# Altium PCB PCB1.PcbDoc
Units mil, origin at the board's own origin, x right, y up, seen from the top; angles counter-clockwise.
Board outline 6000 x 4000 mil, 2 copper layers (Top Layer, Bottom Layer); 67 components, 53 nets, 228 pads, 101 vias.
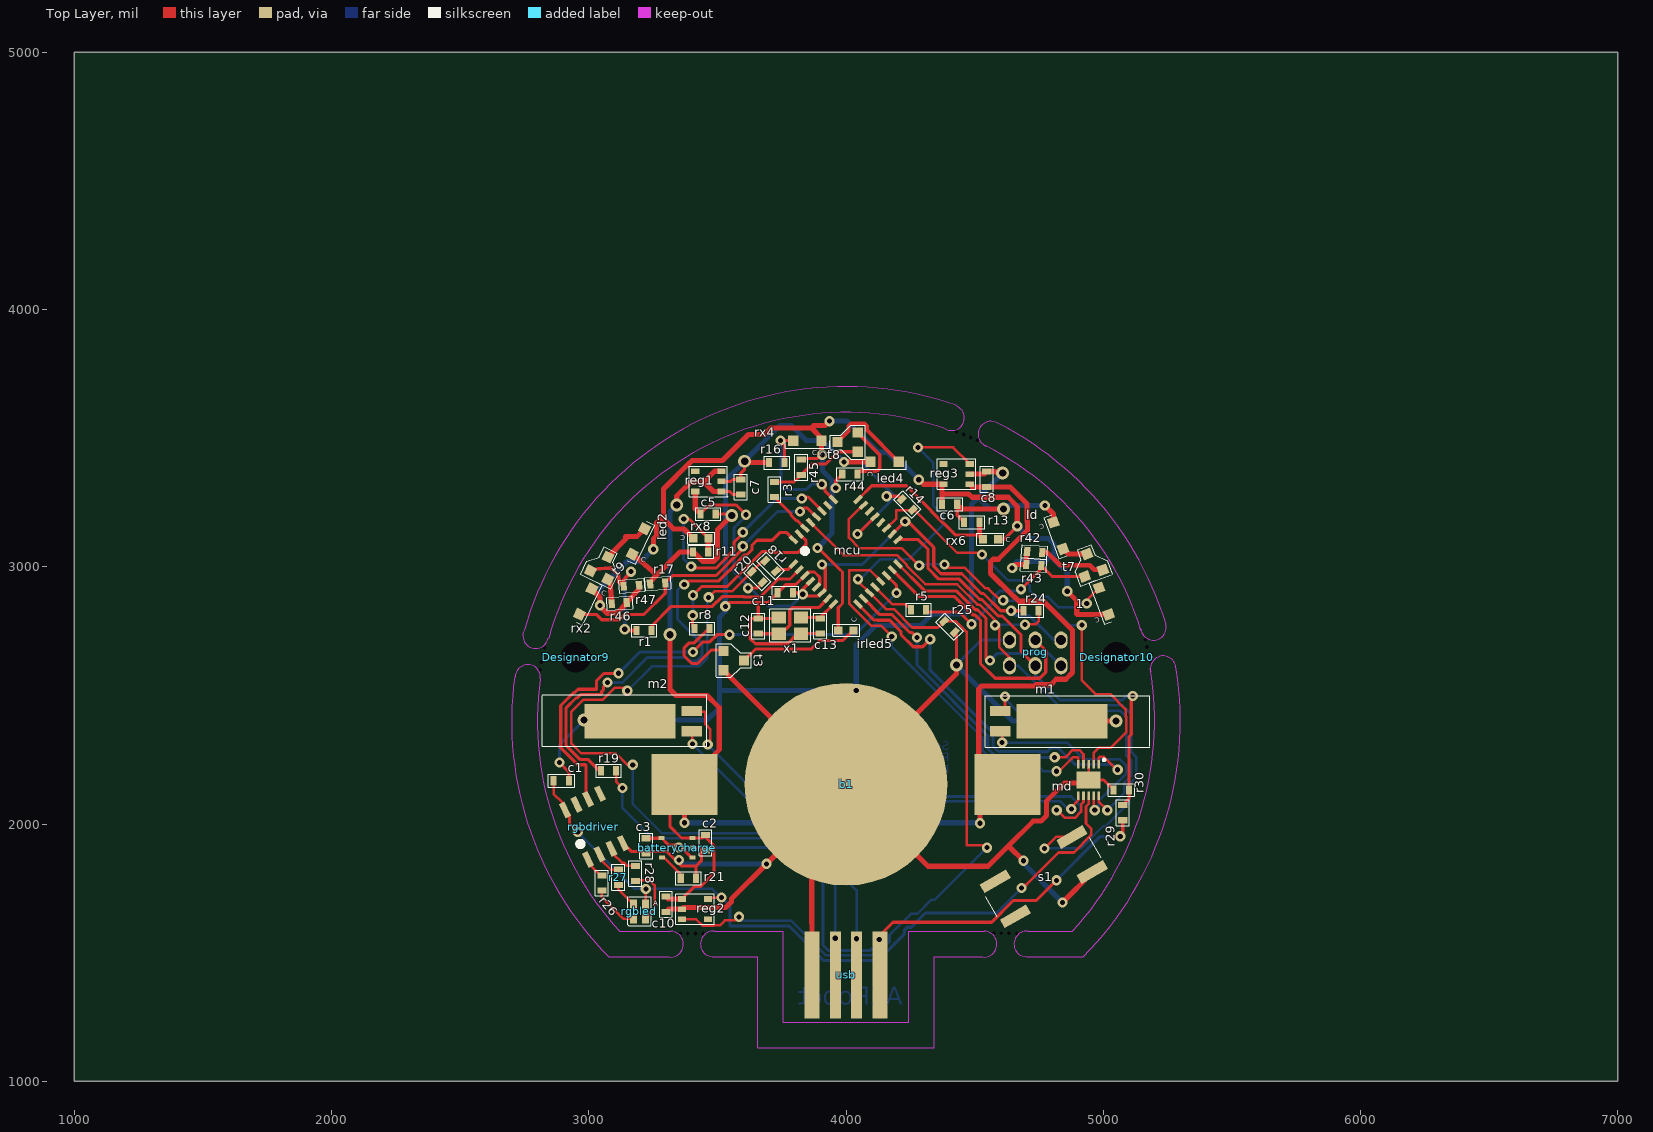
[diagram p0: Top Layer view]
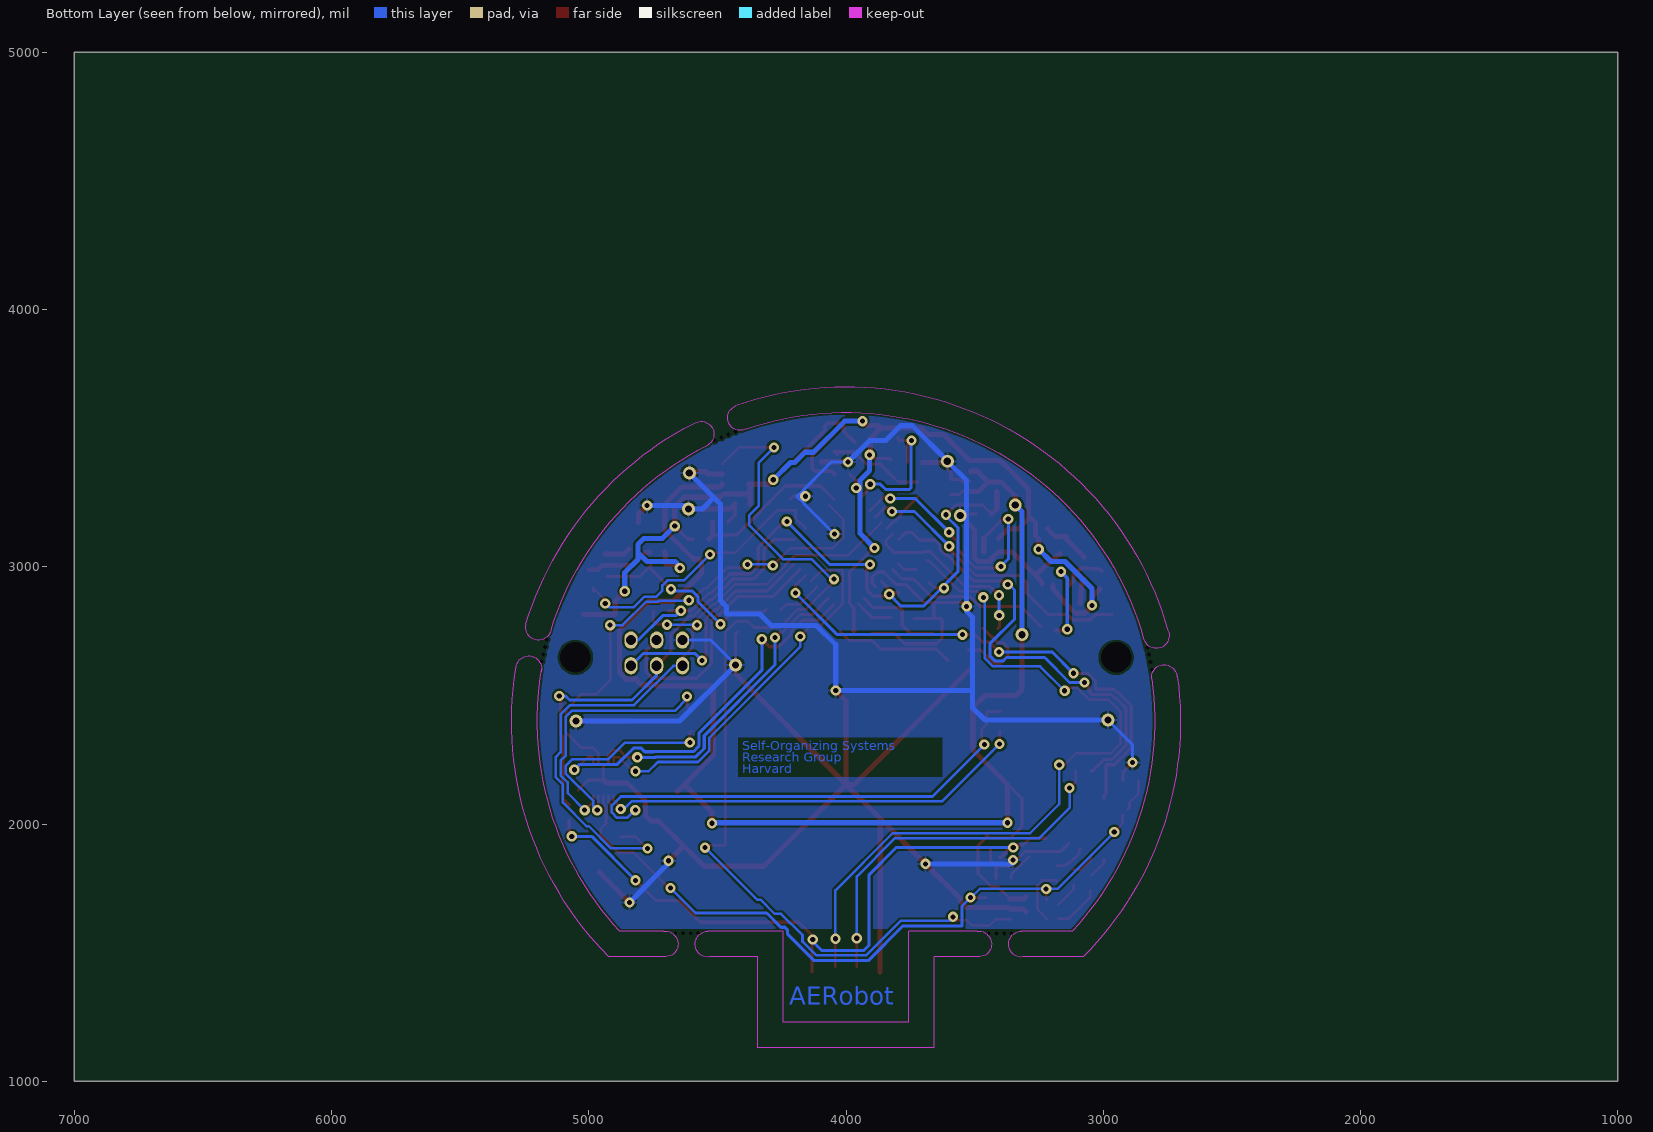
[diagram p1: Bottom Layer view, seen from below]

## Layer stack, top to bottom
Top Layer: signal copper 1.4
Dielectric: dielectric 12.6, FR-4, Dk 4.8
Bottom Layer: signal copper 1.4

## Board outline
1000,1000 7000,1000 7000,5000 1000,5000

## Design rules (kind name [scope] priority, off if disabled: settings)
Clearance [All] p1: gap=9
PolygonConnect [All] p1: connectstyle=Relief reliefconductorwidth=10 reliefentries=4 polygonreliefangle="90 Angle" airgapwidth=10
RoutingVias [All] p1: holewidth=20 width=40 viastyle="Through Hole" minholewidth=20 minwidth=40 maxholewidth=28 maxwidth=50
SilkscreenOverComponentPads [All] p1: minsilkscreentomaskgap=10
SolderMaskExpansion [All] p1: expansion=4
Width [All] p1: maxlimit=20 minlimit=10 preferedwidth=10
27 further rules are at their usual default settings.

## Components (designator, comment, footprint, x,y, rotation, side; value= is the part's Value field where it differs from the comment)
1 "IR_RX" "IR SENSOR" 5002.17,2866.69 r290 top
b1 "battery" BATTERY 4000,2154 r180 top
batterycharge "battery charge" "Battery charger" 3344,1908 r180 top
c1 "0603cap" 0603NEW 2893,2168 r180 top
c2 "0603cap" 0603NEW 3454,1927 r270 top
c3 "0603cap" 0603NEW 3223,1915 r270 top
c5 "0603cap" 0603NEW 3464,3205 r0 top
c6 "0603cap" 0603NEW 4403,3243 r0 top
c7 "0603cap" 0603NEW 3591,3310 r90 top
c8 "0603cap" 0603NEW 4547,3340 r90 top
c10 "0603cap" 0603NEW 3300,1688 r270 top
c11 "0603cap" 0603NEW 3764,2899 r180 top
c12 "0603cap" 0603NEW 3659,2770 r90 top
c13 "0603cap" 0603NEW 3900,2770 r270 top
Designator9 "Comment" HOLE 2950,2648 r0 top
Designator10 "Comment" HOLE 5052,2648 r180 top
irled5 "LED ir down" IRDOWN 3970,2753 r0 top
ld "LED IR" "IR LED" 4824.97,3121.43 r110 top
led2 "LED IR" "IR LED" 3193.18,3098.23 r244 top
led4 "LED IR" "IR LED" 4150,3408 r180 top
m1 "motor_smd" motor 4600,2400 r0 top
m2 "motor_smd" motor 3400,2400 r180 top
mcu "atmega168" 32pintqfp 3999,3058 r45 top
md "motor driver" "MOTOR DRIVER" 4982.37,2171 r270 top
prog "programming connector" "Program connector" 4636,2615 r90 top
r1 "resistor0603" 0603NEW 3215,2752 r0 top
r3 "resistor0603" 0603NEW 3722,3300 r270 top
r5 "resistor0603" 0603NEW 4282,2833 r0 top
r8 "resistor0603" 0603NEW 3440,2760 r0 top
r11 "resistor0603new" 0603NEW 3435,3058 r0 top
r13 "resistor0603new" 0603NEW 4489,3173 r0 top
r14 "resistor0603new" 0603NEW 4238,3242 r315 top
r16 "resistor0603new" 0603NEW 3731,3405 r0 top
r17 "resistor0603new" 0603NEW 3267.72,2935.22 r4 top
r18 "resistor0603" 0603NEW 3707,3003 r135 top
r19 "resistor0603" 0603NEW 3077,2207 r0 top
r20 "resistor0603" 0603NEW 3655,2960 r135 top
r21 "resistor0603" 0603NEW 3387,1789 r0 top
r24 "resistor0603" 0603NEW 4719,2829 r0 top
r25 "resistor0603" 0603NEW 4402,2767 r135 top
r26 "resistor0603" 0603NEW 3051,1771 r90 top
r27 "resistor0603" 0603NEW 3115,1793 r90 top
r28 "resistor0603" 0603NEW 3181,1808 r90 top
r29 "resistor0603" 0603NEW 5076,2044 r270 top
r30 "resistor0603" 0603NEW 5070,2132 r180 top
r42 "resistor0603" 0603NEW 4733.23,3057.67 r176 top
r43 "resistor0603" 0603NEW 4729.68,3006.79 r176 top
r44 "resistor0603" 0603NEW 4015,3360 r180 top
r45 "resistor0603" 0603NEW 3826,3387 r90 top
r46 "resistor0603" 0603NEW 3118.7,2858.64 r4 top
r47 "resistor0603" 0603NEW 3166.1,2926.11 r4 top
reg1 "regulator33" REGULATOR 3465,3332 r180 top
reg2 "regulator33" REGULATOR 3413,1669 r0 top
reg3 "regulator33" REGULATOR 4430,3360 r180 top
rgbdriver "rgbdrivernew" RGBDRIVERNEW 3020,1990 r25 top
rgbled "RGBLED" RGBLED 3197,1660 r90 top
rx2 "IR_RX" "IR SENSOR" 2987.97,2864.54 r64 top
rx4 "IR_RX" "IR SENSOR" 3850,3490 r0 top
rx6 "IR rx down" IRDOWN 4592.06,3107 r180 top
rx8 "IR rx down" IRDOWN 3406,3111 r0 top
s1 "switch" SWITCH 4701,1745 r210 top
t3 "transistor" TRANSISTOR 3603,2635 r270 top
t7 "transistor PNP" TRANSISTOR 4936.43,3049.27 r20 top
t8 "transistor PNP" TRANSISTOR 3967.07,3484.41 r90 top
t9 "transistor PNP" TRANSISTOR 3074.69,3038.18 r334 top
usb "usb" USB 4000,1582.8 r180 top
x1 "xtal1" XTAL1 3782,2771 r0 top

## Footprints (in the part's own frame and the unit in brackets; to place one, negate y for a bottom-side part, rotate by r counter-clockwise, add the part's x,y. Pads: shape width x height; smd on the part's side, far side on the other; paste and mask are expansions set on the pad)
32pintqfp [mm]
  rect 1x0.4 smd: 1(-4.5,2.8) 2(-4.5,2) 3(-4.5,1.2) 4(-4.5,0.4) 5(-4.5,-0.4) 6(-4.5,-1.2) 7(-4.5,-2) 8(-4.5,-2.8) 17(4.5,-2.8) 18(4.5,-2) 19(4.5,-1.2) 20(4.5,-0.4) 21(4.5,0.4) 22(4.5,1.2) 23(4.5,2) 24(4.5,2.8)
  rect 0.4x1 smd: 9(-2.8,-4.5) 10(-2,-4.5) 11(-1.2,-4.5) 12(-0.4,-4.5) 13(0.4,-4.5) 14(1.2,-4.5) 15(2,-4.5) 16(2.8,-4.5) 25(2.8,4.5) 26(2,4.5) 27(1.2,4.5) 28(0.4,4.5) 29(-0.4,4.5) 30(-1.2,4.5) 31(-2,4.5) 32(-2.8,4.5)
  silkscreen extent -3.04,2.67 -2.54,3.17
0603NEW [mm]
  rect 0.6x0.9 smd: 1(-0.75,0) 2(0.75,0)
  silkscreen extent -1.27,-0.64 1.27,0.64
BATTERY [mm]
  round 20 smd: 0(0,0)
  rect 6.5x6 smd: 1(-15.95,0) 2(15.95,0)
"Battery charger" [mm]
  rect 0.6x0.4 smd: 1(-1.5,0.95) 2(-1.5,0) 3(-1.5,-0.95) 4(1.548,-0.95) 5(1.5,0.95)
HOLE [mm]
  rect 0.1x0.1 hole 3: 0(0,0)
"IR LED" [mm]
  rect 1x1 smd: 0(1.4,0) 1(-1.4,0)
  silkscreen extent -2.16,-0.13 2.16,0.74
"IR SENSOR" [mm]
  rect 1x1 smd: 0(-1.4,0) 1(1.4,0)
  silkscreen extent -2.21,-0.76 2.18,-0.03
IRDOWN [mm]
  rect 0.8x0.8 smd: 1(0,0) 2(1.5,0)
  silkscreen extent -0.56,-0.58 2.13,0.61
motor [mm]
  rect 2x1 smd: 0(0,1) 1(0,-1)
  rect 9x3.4 smd: 2(6.1,0)
  silkscreen extent -1.5,-2.58 14.75,2.5
"MOTOR DRIVER" [mm]
  rect 0.85x0.25 smd: 1(-1.55,0) 2(-1.55,-0.5) 3(-1.55,-1) 4(-1.55,-1.5) 5(-1.55,-2) 6(1.55,-2) 7(1.55,-1.5) 8(1.55,-1) 9(1.55,-0.5) 10(1.55,0)
  rect 1.65x2.38 smd: 11(0,-1)
  silkscreen extent -2.07,0.45 -1.91,0.61
"Program connector" [mm]
  oval 1.7x1.3 hole 1: 1(0,0) 2(0,-2.54) 3(0,-5.08) 4(2.54,-5.08) 5(2.54,-2.54) 6(2.54,0)
REGULATOR [mm]
  rect 0.8x0.55 smd: 1(-1.3,1) 2(-1.3,0) 3(-1.3,-1) 4(1.3,-1) 5(1.3,1)
  silkscreen extent -1.91,-1.5 1.91,1.5
RGBDRIVERNEW [mm]
  rect 0.6x1.55 smd: 1(-1.905,-2.7) 2(-0.635,-2.7) 3(0.635,-2.7) 4(1.905,-2.7) 5(1.905,2.7) 6(0.635,2.7) 7(-0.635,2.7) 8(-1.905,2.7)
  silkscreen extent -2.2,-1.25 -1.68,-0.73
RGBLED [mm]
  rect 1x0.7 smd: 1(0.7,0.6) 2(-0.7,0.6) 3(-0.7,-0.6) 4(0.7,-0.6)
  silkscreen extent -1.42,-1.14 1.47,1.14
SWITCH [mm]
  rect 3x1 smd: 1(-6.5,1.75) 2(2.25,1.75) 3(-6.5,-2.25) 4(2.25,-2.25)
  silkscreen extent -7.95,-1.4 3.86,0.97
TRANSISTOR [mm]
  rect 1x1 smd: 1(-0.95,-2) 2(0.95,-2) 3(0,0)
  silkscreen extent -1.68,-2.74 1.65,0.74
USB [mm]
  rect 1.5x8.6 smd: 0(-3.35,4.3) 3(3.35,4.3)
  rect 1.1x8.6 smd: 1(-1.05,4.3) 2(1.05,4.3)
  Keep-Out Layer lines w0.05: 8,0 6.2,0 6.2,9 -6.2,9 -6.2,0 -8,0
XTAL1 [mm]
  rect 1.4x1.2 smd: 1(-1.1,-0.8) 2(1.1,-0.8) 3(1.1,0.8) 4(-1.1,0.8)
  silkscreen extent -2.01,-1.6 2.03,1.68

## Part data
Designator9 Designator10: library part hole
rgbdriver: "rgbdrver"
x1: library part xtal, "xtal"

## Free pads (board coordinates)
  round 0 hole 15 unplated: 0(2810.85,2599.73) 0(2816.57,2629.18) 0(2822.3,2658.63) 0(2827.64,2686.11) 0(3357,1575) 0(3385,1575) 0(3415,1575) 0(3445,1575) 0(4429.96,3526.05) 0(4457.58,3514.33) 0(4485.19,3502.6) 0(4510.97,3491.66) 0(4575.76,1575.03) 0(4603.76,1575.03) 0(4633.76,1575.03) 0(4663.76,1575.03) 0(5163.52,2717.64) 0(5170.27,2688.41) 0(5177.01,2659.18) 0(5183.31,2631.9)

## Via types
v1: diameter 40, hole 20, Top Layer to Bottom Layer, 92 vias
v2: diameter 50, hole 28, Top Layer to Bottom Layer, 9 vias

## Nets (pads, with @x,y where several pads share a name; then routed paths per layer and width w, separated by ;. In a path a pad name is that pad's centre, name@x,y a point inside that pad or via, vN(x,y) a via of type N, cw(c..) or ccw(c..) an arc to the next point about the centre after c; other vN are vias at no path point)
GND: b1.0 batterycharge.2 c1.1 c2.2 c3.2 c5.2 c6.2 c7.2 c8.2 c10.2 c11.2 c12.2 c13.2 ld.0 led2.0 led4.0 m1.2 m2.2 mcu.3 mcu.5 mcu.21 md.3 md.11 prog.6 r11.1 r13.1 r14.1 r16.1 r17.1 r21.2 r25.1 r30.2 reg1.2 reg2.2 reg3.2 rgbdriver.4 s1.1 t3.2 usb.3 x1.2 x1.4 | length 14883.6
  Top Layer w10: md.11 md.3
  Top Layer w12: v1(2886,2239) 2922.53,2202.47 c1.1 ; rgbdriver.4 3164.78,1893.47 3302.97,1893.47 3312.76,1883.69 ; 3312.76,1885.1 3312.76,1883.69 ; batterycharge.2 3433,1908 3437.51,1903.49 3437.51,1856.51 3418,1837 ; r21.2 3416.53,1835.53 3418,1837 ; c5.2 v2@3550,3205 ; reg1.2 3552,3332 3559.53,3339.53 c7.2 3591,3364 3606,3379 v2(3606,3410) ; v1(3531,2846) 3546,2861 3696.47,2861 c11.2 3767.19,2931.72 3805.9,2931.72 mcu.3 3853.53,2979.35 3877.57,2979.35 3898.08,2958.84 3898.08,2935.08 3884.86,2921.86 mcu.5 ; v2@3608.82,3412.82 v2(3606,3410) ; v2@3613.72,3402.28 3611,3405 v2(3606,3410) ; 3659,2855.3 c12.2 ; x1.4@3735.72,2799.53 c12.2 ; x1.2 3811.09,2739.5 3772.47,2700.88 3647.85,2700.88 3626.28,2722.45 3626.28,2794.72 3631.09,2799.53 c12.2 ; x1.2@3826.28,2740.47 c13.2 ; v1(4045,3127) 4112.41,3194.41 mcu.21 ; v1(4158,3274) 4206,3274 r14.1 ; r25.1 4429,2740 v2(4429,2618) ; c6.2 4432.53,3199.94 r13.1 ; md.11 5001.47,2171 r30.2 ; 3312.76,1883.69 3312.76,1883.24 3359,1837 3418,1837
  Top Layer w20: led2.0 3171.48,3048.86 3263.8,2968.61 3237.87,2938.78 r17.1 ; 3250.39,2953.18 3355.21,3058 r11.1 ; c10.2 3310.53,1669 reg2.2 3367.82,1675 3532.15,1675 3555,1697.85 3555,1709 v1(3691,1845) b1.0@3867,2021 ; r11.1@3406.72,3058 3444.43,3020.28 3484.62,3020.28 3500.8,3036.46 3500.8,3143.8 v2(3556,3199) ; t3.2 3967.86,2154 b1.0 ; v2@3611,3405 r16.1 ; 3867,1616.11 3867,1633 ; usb.3@3868.11,1425.32 3868.11,1631.89 3867,1633 ; v1(3992,3407) 3993,3408 led4.0 ; v1(4040,2519) 4000,2479 b1.0 ; v2(4429,2618) 4429,2583 b1.0 ; c6.2 4450.53,3225 v2(4612,3225) ; reg3.2 4537.47,3360 c8.2 4547.47,3370 4581,3370 4587,3364 v2(4609,3364) ; v1(4690,1857) 4636,1911 4636,1919 ; v1(4773,3238) 4806.12,3204.88 ld.0 ; m1.2 v2(5050,2400) ; v1(4842,1695) 4957.07,1810.07 s1.1 ; md.11 4932,2160 4850,2160 4780,2090 4780,2033.11 4757.89,2011 4728,2011 4636,1919 ; 3867,1633 b1.0@3867,2021 ; b1.0@3867,2021 b1.0 ; b1.0 4318.5,1835.5 4552.5,1835.5 4636,1919
  Bottom Layer w12: v1(2886,2239) 2886,2308 v2(2982,2404) ; v1(3992,3407) 4057,3407 4186,3278 ; v1(4045,3127) 4191,3273 4186,3278 ; v1(4158,3274) 4162,3278 4186,3278 ; v2(4429,2618) 4526,2715 prog.6
  Bottom Layer w20: v2(2982,2404) 3460,2404 3508,2452 3508,2514 ; v1(3351,1860) 3351,1853 3359,1845 v1(3691,1845) ; v2@3605,3411 3742.35,3548.35 3748.54,3548.35 ; v2(3606,3410) 3531,3335 v1(3531,2846) 3531,2827 3508,2804 3508,2514 ; 3749.19,3549 3748.54,3548.35 ; v1(3992,3407) 3908,3491 3845.64,3491 3788.29,3548.35 3748.54,3548.35 ; v2(4429,2618) 4647,2400 v2(5050,2400) ; v2(4609,3364) 4514,3269 ; v1(4690,1857) 4690,1847 v1(4842,1695) ; v1(4773,3238) 4625,3238 v2(4612,3225) 4558,3225 4514,3269 ; 3508,2514 3513,2519 v1(4040,2519) 4040,2696.57 4114.43,2771 4289,2771 4289.72,2770.28 4336.43,2817 4464,2817 4464,2843.94 4488,2867.94 4488,3243 4514,3269
Net1_0: 1.0 mcu.19 r14.2 | length 1096.1
  Top Layer w10: mcu.19 4196,3188.19 4196,3220 4266.47,3220 4432.47,3054 4523,3054 v1(4529,3048) ; v1(4936,2857) 4936,2871.17 1.0 1.0@4982.31,2904.1
  Bottom Layer w10: v1(4529,3048) 4630,2947 4694.08,2947 4714,2927.08 4714,2907 4738,2883 4784.87,2883 4825.87,2842 4920,2842 4935,2857 v1(4936,2857)
Netb1_1: b1.1 b1.2 batterycharge.3 c2.1 c7.1 c8.1 c10.1 reg1.1 reg1.3 reg2.1 reg3.1 | length 5969.9
  Top Layer w12: reg2.1 3409.73,1756.28 3434.55,1756.28 3486.72,1808.45 3486.72,1915.5 3454,1948.21 c2.1 3442.87,1945.4 batterycharge.3 3360.4,1945.4 3315,1990.8 3315,2096.95 b1.2 ; reg1.1 3548.37,3292.63 3560.53,3280.47 c7.1
  Top Layer w20: c10.1 3309.16,1708.37 reg2.1 ; v2(3316,2736) 3316,2523 3339.25,2499.75 3459.25,2499.75 3507,2452 3507,2288.95 b1.2 v1(3372.05,2004.95) ; v2(3342,3240) 3342,3275.67 3396.33,3330 3447.61,3330 ; reg1.1 3484.98,3292.63 3447.61,3330 ; reg1.3 3488.98,3371.37 3447.61,3330 ; reg3.1 4491.34,3310.47 c8.1 4638.53,3310.47 4704,3245 4704,3176.15 ; v1(4521,2003) 4521,2047.05 b1.1 ; b1.1@4655.82,2126.13 b1.1 ; 4705,3175.15 4705,3141.85 4592.15,3029 4572,3029 4562,3019 4562,2974.15 4650,2886.15 4651.69,2886.15 4672.13,2865.72 4768.21,2865.72 4880.59,2753.33 4880.59,2588.66 4854.47,2562.54 4817.53,2562.54 4796.53,2541.54 4738.25,2541.54 4732.71,2536 4527,2536 4516,2525 4516,2265.95 b1.1
  Bottom Layer w20: v2(3316,2736) 3316,3214 v2(3342,3240) ; v1(3372.05,2004.95) 4519.05,2004.95 v1(4521,2003)
Netbatterycharge_1: batterycharge.1 batterycharge.4 c3.1 r29.2 usb.0 | length 2644.3
  Top Layer w12: c3.1 batterycharge.4@3282.18,1944.53 ; batterycharge.4 3309.46,1919 3340,1919 v1(3350,1909) ; v1@3356,1915 3375.24,1895.76 3375.24,1893.5 3398.14,1870.6 batterycharge.1 ; v1(4129,1551) usb.0@4131.89,1548.11 ; usb.0@4131.89,1425.32 usb.0@4131.89,1548.11 ; v1(4818,1781) 4739.62,1702.62 4650.59,1702.62 4565.97,1618 4183,1618 4131.89,1566.89 usb.0@4131.89,1548.11 ; v1(5066,1952) 5076,1962 r29.2
  Bottom Layer w12: v1(3350,1909) 3804,1909 3910,1803 3910,1529.28 3930.28,1509 4095,1509 4133,1547 v1(4129,1551) ; v1(4818,1781) 4989,1952 v1(5066,1952)
Netbatterycharge_5: batterycharge.5 r21.1 | length 115.7
  Top Layer w10: batterycharge.5 3291.9,1870.6 3357.47,1805.03 r21.1
Netc1_2: c1.2 md.8 reg2.5 rgbdriver.8 rgbled.4 | length 2942.2
  Top Layer w10: c1.2 2863.47,2117.53 2898,2083 2898,2063.75 rgbdriver.8 ; rgbdriver.8@2925,2036.75 2925,2001 v1(2957,1969) ; rgbled.4@3220.62,1705.62 3222,1707 v1(3222,1747) ; reg2.5@3454.18,1713.37 3515.37,1713.37 v1(3516,1714) ; 4700,1763 4826.09,1889.09 4886.06,1889.09 4953.31,1956.35 4953.31,1982.36 4933,2002.67 4933,2068.08 4943,2078.08 md.8
  Top Layer w12: v1(4682,1751) 4694,1763 4700,1763
  Bottom Layer w10: v1(2957,1969) 3178,1748 3480,1748 3514,1714 v1(3516,1714)
  Bottom Layer w12: v1(3516,1714) 3549,1681 3549,1604 3778.72,1604 3913.72,1469 4123.37,1469 4228.11,1573.74 4228.11,1589.42 4237.47,1598.78 4253.15,1598.78 4308.37,1654 4585,1654 v1(4682,1751)
Netc5_1: c5.1 c11.1 mcu.4 mcu.6 mcu.18 prog.4 r20.1 r24.1 reg1.5 | length 2598.9
  Top Layer w12: c5.1 3469.47,3240 3573,3240 v1(3611,3202) ; v1@3619,2921 v1(3619,2917) 3653.76,2917 r20.1 ; c11.1 v1@3817.73,2899 ; mcu.4 3826,2907.27 3847.17,2886.1 3893.92,2886.1 mcu.6 3919.35,2911.53 3919.35,2996.65 v1(3907,3009) ; mcu.18 4223.36,3171 v1@4225,3171 ; v1(4230,3176) v1@4225,3171 ; 4450.66,2971.59 4526.13,2896.11 4534.35,2896.11 4601.46,2829 v1(4642,2829) r24.1 ; 4450.66,2973 4369.5,2973 4341,3001.5 4341,3075.3 4245.3,3171 v1@4225,3171
  Top Layer w20: reg1.5 3413.82,3225.65 c5.1
  Bottom Layer w12: v1(3611,3202) 3611,3197.43 3564,3150.43 3564,2982.02 3699.02,2847 3786,2847 v1(3832,2893) ; v1(3907,3009) 4063,3009 v1(4230,3176) ; v1(4642,2829) 4660,2811 4711,2811 4807,2715 prog.4
Netc12_1: c12.1 mcu.7 x1.1 | length 360.5
  Top Layer w12: c12.1@3659.97,2739.5 x1.1 3748.1,2739.5 3781.25,2772.66 3781.25,2830.84 3791.53,2841.12 3893.47,2841.12 mcu.7
Netc13_1: c13.1 mcu.8 x1.3 | length 147.2
  Top Layer w12: x1.3@3825.91,2803.1 3900,2803.1 mcu.8
Netirled5_2: irled5.2 t3.3 | length 465.8
  Top Layer w12: t3.3 3647.88,2679.88 3864.22,2679.88 3898,2713.66 3987.66,2713.66 irled5.2@4022,2748
Netld_1: ld.1 t7.3 | length 101
  Top Layer w20: ld.1 4864.18,3049.27 t7.3
Netled2_1: led2.1 t9.3 | length 193.6
  Top Layer w20: t9.3 3144,3107.48 3144,3117 3186.57,3117 led2.1
Netled4_1: led4.1 t8.3 | length 353.3
  Top Layer w15: t8.3 4009.63,3526.96 4009.63,3548.33 4019.29,3558 4072.33,3558 4082,3548.33 4082,3531.12 led4.1
Netm1_0: m1.0 md.10 | length 1053.1
  Top Layer w10: m1.0 4618,2457.37 v1(4618,2496) ; md.10 4982.37,2087.63 v1(5016,2054)
  Bottom Layer w10: v1(4618,2496) 4618,2487 4665,2440 5066.57,2440 5089,2417.57 5089,2267 5109,2247 5109,2189.05 5081.64,2161.69 5081.64,2119.64 v1(5016,2054)
Netm1_1: m1.1 md.9 | length 847.4
  Top Layer w10: m1.1 4607,2353.63 v1(4607,2317) ; md.9 4962.69,2058.32 v1(4967,2054)
  Bottom Layer w10: v1(4607,2317) 4608,2316 4860,2316 4924,2252 5063.08,2252 5090,2225.08 5090,2196.92 4982,2088.92 4982,2069 v1(4967,2054)
Netm2_0: m2.0 md.6 | length 1692.1
  Top Layer w10: m2.0 3403,2357.63 v1(3403,2311) ; v1(4876,2058) 4876,2064.82 4903.63,2092.45 md.6
  Bottom Layer w10: v1(3403,2311) 3626,2088 4833.08,2088 4863.08,2058 v1(4876,2058)
Netm2_1: m2.1 md.7 | length 2063.5
  Top Layer w10: m2.1 3403.37,2436 3453,2436 3453,2387.9 3473,2367.9 3473,2320 v1(3462,2309) ; v1(4819,2054) 4821,2054 4851,2024 4890.08,2024 4914,2047.92 4914,2075.95 4923.32,2085.27 md.7
  Bottom Layer w10: v1(3462,2309) 3664,2107 4875.08,2107 4910,2072.08 4910,2043.92 4890.08,2024 4851,2024 4821,2054 v1(4819,2054)
Netmcu_1: mcu.1 r18.1 | length 76.9
  Top Layer w12: r18.1@3727.88,2988.9 3774,2988.9 mcu.1
Netmcu_2: mcu.2 r1.2 | length 669.5
  Top Layer w12: r1.2@3241.91,2767.01 3320.9,2846 3480.5,2846 3518.5,2884 3602.5,2884 3604.5,2882 3665.67,2882 3736.39,2952.72 3782.36,2952.72 mcu.2
Netmcu_9: mcu.9 md.1 | length 1540.2
  Top Layer w10: md.1 4982.37,2256.37 4988,2262 5001,2262 5052,2211 v1(5056,2211)
  Top Layer w12: mcu.9 4108.84,2792.27 4122.27,2792.27 4122.53,2792 4170,2792 4214,2748 4214,2736.09 4261.09,2689 4298,2689 v1(4327,2718)
  Bottom Layer w12: v1(4327,2718) 4327,2597.27 4572,2352.27 4572,2302.5 4592.5,2282 4747.27,2282 4748.27,2281 4782.09,2281 4796.09,2295 4825.91,2295 4888.91,2232 5035,2232 v1(5056,2211)
Netmcu_10: mcu.10 md.4 | length 1259.6
  Top Layer w10: v1(4811,2259) 4854,2259 4857,2262 4857,2262.7 4881.3,2287 4907,2287 4923.31,2270.69 md.4
  Top Layer w12: mcu.10 4131.64,2814 4178.72,2814 4248.72,2744 4257,2744 v1(4276,2725)
  Bottom Layer w12: v1(4276,2725) 4276,2618.57 4551,2343.57 4551,2293.8 4583.8,2261 4738.57,2261 4740.57,2259 v1(4811,2259)
Netmcu_11: mcu.11 r25.2 reg2.3 reg3.3 | length 3889.4
  Top Layer w10: reg2.3 3417.81,1629.63 3442.63,1604.8 3485.73,1604.8 3486.93,1606 3510,1606 3529,1625 3570,1625 v1(3584,1639) ; v1(4047,2952) 4047,2943.19 mcu.11 4155.19,2835 4186,2835 4257,2764 4357.24,2764 r25.2 4427.39,2787.88 4469,2746.27 4469,1918 4534,1918 4553,1899 4553,1903 v1(4548,1908) ; v1(4280,3464) 4416.55,3464 reg3.3
  Bottom Layer w10: v1(3584,1639) 3599,1624 3787,1624 3922,1489 4115.08,1489 4169.06,1542.98 4169.06,1568.06 4251.94,1650.94 4277.02,1650.94 4331,1704.92 4344.92,1704.92 v1(4548,1908) ; v1@4064.5,2961 4133.37,3029.88 4244.88,3029.88 4376,3161 4376,3200.5 4340,3236.5 4340,3404 v1(4280,3464)
Netmcu_12: mcu.12 r5.1 | length 176
  Top Layer w10: mcu.12 4180.73,2854 4231.47,2854 r5.1
Netmcu_13: mcu.13 md.5 | length 1535.6
  Top Layer w10: mcu.13 4092.27,2987 4012,2987 4011.84,2987.16 4011.84,2856.91 4097.75,2771 4135.91,2771 v1(4178,2728.91) ; v1(4818,2205) 4828.28,2205 4877,2253.72 4877,2254.41 4882.59,2260 4900,2260 4903.63,2256.37 md.5
  Bottom Layer w10: v1(4178,2728.91) 4178,2688.28 4531,2335.28 4531,2285.52 4575.52,2241 4730.28,2241 4733.28,2238 4734.7,2238 4767.7,2205 v1(4818,2205)
Netmcu_14: mcu.14 rgbdriver.6 | length 2014.7
  Top Layer w12: rgbdriver.6 2997.73,2110.27 2990,2118 2990,2227.77 2987.3,2230.47 2956.6,2230.47 2891,2296.08 2891,2460.4 2941.6,2511 2946.14,2511 2959.07,2523.93 3029.5,2523.93 3029.5,2556 3058.5,2585 3115,2585 v1(3116,2586) ; v1(3405,2669) 3443.96,2707.96 3470.96,2707.96 3499,2736 v1(3547,2736) ; mcu.14 4196,2927.81 v1(4196,2898)
  Bottom Layer w12: v1(3116,2586) 3199,2669 v1(3405,2669) ; v1(3547,2736) 4034,2736 v1(4196,2898)
Netmcu_15: mcu.15 prog.5 | length 1021.2
  Top Layer w12: mcu.15 4284.36,2884 4422.28,2884 4494.28,2812 4502.5,2812 4523,2791.5 4523,2623.46 4579.93,2566.54 4752.81,2566.54 4776.59,2590.31 4776.59,2674.41 prog.5
Netmcu_16: mcu.16 prog.3 | length 918.1
  Top Layer w12: mcu.16 4300.9,2912 4301,2912 4308,2905 4430,2905 ; 4432.52,2903.46 4502.98,2833 4511.2,2833 4544,2800.2 4544,2637.96 v1@4546,2635.96 ; v1@4546,2635 4552.52,2628.48 v1(4560,2635.96)
  Bottom Layer w12: v1(4560,2635.96) 4587.51,2663.46 4787.54,2663.46 prog.3
Netmcu_17: mcu.17 prog.2 r29.1 r30.1 | length 1720.7
  Top Layer w12: mcu.17 4281.28,3105.33 4319.3,3067.3 4319.3,2993.5 4360.8,2952 4440.12,2952 ; 4440.77,2951.77 4519.55,2873 4527.76,2873 4592.76,2808 4608.28,2808 4680,2736.28 4680,2671 prog.2 ; r29.1 5099.53,2097.06 r30.1 5099.53,2338.24 5109,2347.72 5109,2492 v1(5115,2498)
  Bottom Layer w12: prog.2 4736,2612 4736,2578.01 4832.15,2481.86 5075,2481.86 5091.14,2498 v1(5115,2498)
Netmcu_23: mcu.23 md.2 | length 1912
  Top Layer w10: mcu.23@4064.95,3238.95 4011,3185 4011,3112.92 4052.08,3071.84 4217.43,3071.84 v1(4284.3,3004.97) ; v1(4383,3009) 4395,2997 4460.6,2997 4541.49,2916.11 4552.03,2916.11 4598.15,2870 v1(4611,2870) ; v1(4917,2773) 4917,2558 4970,2505 5028,2505 5087,2446 5087,2418.15 5089,2416.15 5089,2356 5030,2297 4983,2297 4962.69,2276.69 md.2
  Bottom Layer w10: v1@4283,3006.26 v1(4284.3,3004.97) ; v1@4297,3009 v1(4383,3009) ; v1(4611,2870) 4613,2868 4726.13,2868 4730.13,2864 4777,2864 4868,2773 v1(4917,2773)
Netmcu_24: mcu.24 r13.2 rx6.2 | length 647.9
  Top Layer w12: mcu.24 4100.1,3315 4235.25,3315 4332,3218.25 4332,3216.11 4424.11,3124 4516,3124 rx6.2@4518.53,3121.47
  Top Layer w20: r13.2 4518.53,3121.47 rx6.2
Netmcu_25: mcu.25 r16.2 rx4.0 | length 606.6
  Top Layer w12: v1@3754,3500 v1(3745,3491) ; r16.2 3760.53,3475.47 v1(3745,3491) ; rx4.0 3793.88,3491 v1(3745,3491) ; rx4.0@3794.88,3500 rx4.0@3799.53,3500 ; v1(3906,3321) 3919,3308 3919,3293 3950.78,3261.22 mcu.25
  Bottom Layer w12: v1(3745,3491) 3736,3491 3747,3480 3747,3307 3753,3301 3846.25,3301 3866.25,3321 v1(3906,3321)
Netmcu_27: mcu.27 r11.2 rx8.2 | length 1045.9
  Top Layer w12: v1(3369,3186) 3390.05,3186 rx8.2 ; v1(3398,3001) 3403.72,2995.28 3494.98,2995.28 3564,3064.31 3564,3094.5 3599,3129.5 v1(3599,3134) ; v1(3828,3265) 3834,3271 3852.81,3271 mcu.27
  Top Layer w20: r11.2 3464.53,3110.47 rx8.2
  Bottom Layer w12: v1(3369,3186) 3369,3030 v1(3398,3001) ; v1(3599,3134) 3730,3265 v1(3828,3265)
Netmcu_28: mcu.28 r17.2 rx2.0 | length 1153
  Top Layer w12: rx2.0 3029.04,2815 3049.95,2794.08 3118.84,2794.08 3139.75,2815 3215,2815 3297.17,2897.17 r17.2 3325.89,2966 3495.39,2966 3599,3069.61 v1(3599,3080) ; v1(3821,3215) 3834,3228 3850,3228 3883.59,3194.41 mcu.28
  Bottom Layer w12: v1(3599,3080) 3734,3215 v1(3821,3215)
Netmcu_29: mcu.29 prog.1 r24.2 s1.3 | length 2752.7
  Top Layer w10: mcu.29 3989.57,3045.16 4196.02,3045.16 4197.02,3044.16 4199.67,3044.16 4235.71,3008.12 4235.71,3005.47 4309.18,2932 4432.27,2932 4511.27,2853 4519.48,2853 4596.41,2776.07 v1@4596.41,2771 ; v1(4579,2773) 4581,2771 v1@4596.41,2771 ; prog.1 4636,2647.4 4596.41,2686.99 v1@4596.41,2771 ; v1(4696,2775) 4698,2777 4738,2777 4748.53,2787.53 r24.2 ; v1(4772,1905) 4816.67,1949.67 s1.3
  Bottom Layer w10: v1(4579,2773) 4581,2775 v1(4696,2775) ; prog.1 4670.72,2615 4823.86,2461.86 5072.99,2461.86 5109,2425.85 5109,2280 5128,2261 5128,2181.18 5100.64,2153.82 5100.64,2083.14 5008.75,1991.25 4999.97,1991.25 4913.72,1905 v1(4772,1905)
Netmcu_30: mcu.30 r3.2 | length 171.8
  Top Layer w12: r3.2 3786,3206.47 3786,3200.5 3806.5,3180 3810.19,3180 mcu.30
Netmcu_31: mcu.31 r8.1 | length 710.6
  Top Layer w12: v1(3404,2811) 3404,2766.47 r8.1 ; v1(3405,2889) 3440,2924 3539.33,2924 3675.08,3059.76 3696.51,3059.76 3700.27,3056 3814,3056 3845,3087 3845,3100.64 mcu.31
  Bottom Layer w12: v1(3404,2811) 3407,2814 3407,2818 3405,2820 v1(3405,2889)
Netmcu_32: mcu.32 r19.1 | length 1811.9
  Top Layer w12: r19.1 3040.47,2207 2996,2251.47 2965.3,2251.47 2912,2304.77 2912,2451.7 2950.3,2490 2954.84,2490 2967.77,2502.93 3044.63,2502.93 3050.5,2508.8 3050.5,2515.5 3058,2523 3058,2535 ; v1@3064,2541 v1(3073,2550) ; v1(3371,2931) 3385,2945 3505.51,2945 3582.51,3022 3582.51,3023.41 3604.09,3045 3613.5,3045 3634,3065.5 3634,3083 3654,3103 3713,3103 3744,3134 3767.1,3134 mcu.32
  Bottom Layer w12: v1(3073,2550) 3130.91,2550 3227.91,2647 3376.09,2647 3390.09,2633 3419.91,2633 3440.91,2654 3440.91,2700.09 3345,2796 3345,2910 3366,2931 v1(3371,2931)
Netr1_1: r1.1 r47.1 t9.1 | length 531.5
  Top Layer w12: t9.1 t9.1@3010.72,2988.59
  Top Layer w15: t9.1 3012.11,2990.19 3084.77,2995.27 3116.1,2968.04 3118.04,2940.23 r47.1 3135.01,2947.47 v1(3164.26,2981.12) ; v1(3140,2757) 3145,2752 r1.1
  Bottom Layer w15: v1(3140,2757) 3140,2956.85 v1(3164.26,2981.12)
Netr3_1: r3.1 r45.1 t8.1 | length 389.1
  Top Layer w12: r3.1 3798.06,3329.53 r45.1 3868.53,3400 3922.5,3400 3969.51,3447.01 t8.1 4034.28,3435.47 t8.1@4034,3435.47
Netr5_2: r5.2 r43.1 t7.1 | length 770.5
  Top Layer w12: r5.2 4320.77,2823.76 4441.24,2823.76 v1(4488,2777) ; v1(4680,2913) 4759.13,2992.13 r43.1 4801.38,2962.49 t7.1
  Bottom Layer w12: v1(4488,2777) 4576,2865 4576,2884.5 4597.5,2906 4673,2906 v1(4680,2913)
Netr8_2: r8.2 t3.1 | length 348.9
  Top Layer w12: 3370,2685 3370,2654.5 3400.79,2623.72 3423.19,2623.72 3475.28,2675.8 t3.1@3525,2675.8 ; 3371.5,2685 3390.5,2704 3410.3,2704 3466.3,2760 r8.2
Netr18_2: r18.2 r20.2 usb.1 | length 2998.1
  Top Layer w10: v1(3150,2518) 3138,2530 3101.08,2530 3054.01,2482.93 2978,2482.93 2932,2436.93 2932,2313.06 2970.06,2275 3105.53,2275 3150.53,2230 v1(3171,2230) ; v1(3466,2881) 3489,2904 3557.24,2904 r20.2 3677.12,3023.88 r18.2 ; v1(4041,1554) 4041.34,1553.66 usb.1@4041.34,1445
  Bottom Layer w10: v1(3150,2518) 3245,2613 3428.2,2613 3460.91,2645.72 3460.91,2875.91 v1(3466,2881) ; v1(3171,2230) 3171,2077 3284,1964 3818.85,1964 4041,1741.85 v1(4041,1554)
Netr19_2: r19.2 usb.2 | length 1443.3
  Top Layer w10: r19.2 3106.53,2164.47 v1(3131,2140) ; v1(3958,1556) 3958.66,1555.34 usb.2@3958.66,1445
  Bottom Layer w10: v1(3131,2140) 3131,2063 3250,1944 3810.57,1944 3958,1796.57 v1(3958,1556)
Netr26_1: r26.1 rgbled.2 | length 183
  Top Layer w10: r26.1 3051,1715 3133.56,1632.44 rgbled.2
Netr26_2: r26.2 rgbdriver.1 | length 81.5
  Top Layer w10: rgbdriver.1 2996.95,1849.05 r26.2@3045.47,1800.53
Netr27_1: r27.1 rgbled.1 | length 100.1
  Top Layer w10: r27.1 3115,1745.94 rgbled.1
Netr27_2: r27.2 rgbdriver.2 | length 108
  Top Layer w10: rgbdriver.2 3048,1877.36 3048,1860 3085.47,1822.53 r27.2
Netr28_1: r28.1 rgbled.3 | length 229
  Top Layer w10: r28.1 r28.1@3183.53,1781 ; r28.1@3184.53,1782 r28.1@3183.53,1781 ; rgbled.3 3256,1667.82 3256,1761.08 3236.08,1781 r28.1@3183.53,1781
Netr28_2: r28.2 rgbdriver.3 | length 128.5
  Top Layer w10: rgbdriver.3 3093,1898.81 3093,1886 3130.66,1848.34 3138.52,1848.34 3149.33,1837.53 r28.2
Netr42_1: r42.1 t7.2 | length 264.9
  Top Layer w18: r42.1@4762.77,3056.72 r42.1 4782.39,3055.61 4832.28,3005.72 4947.44,3005.72 4965.08,2988.07 t7.2
Netr44_1: r44.1 t8.2 | length 271.1
  Top Layer w15: r44.1 4056.34,3371.81 4121.4,3371.81 4131.07,3381.48 4131.07,3434.52 4045.81,3519.78 t8.2
Netr46_1: r46.1 t9.2 | length 98.9
  Top Layer w20: t9.2 3083.21,2942.82 r46.1
VCC: 1.1 c6.1 irled5.1 r42.2 r43.2 r44.2 r45.2 r46.2 r47.2 reg3.5 rx2.1 rx4.1 rx6.1 rx8.1 | length 4873.3
  Top Layer w12: r46.2@3139.86,2860.12 r46.2 ; r45.2 3830.47,3421 3888.24,3421 v1@3905.12,3437.88 ; v1(3889,3073) 3892.5,3073 3978,2987.5 3986.16,2979.34 3986.16,2856.91 3970,2840.75 irled5.1 ; v1(3960,3306) 3960,3334.53 r44.2 ; rx6.1 4615,3107 v1(4666,3158)
  Top Layer w20: rx2.1@3012.08,2914.83 rx2.1 3043.54,2882.67 v1(3043.54,2850) 3043.54,2846.37 3070.82,2819.08 3108.48,2819.08 3148.15,2858.75 r46.2 3196.4,2916.2 r47.2 ; v1(3251,3068) 3251,3107.51 3262.66,3119.17 3262.66,3169.66 3290,3197 ; rx8.1 3370,3147 3330,3147 3290,3187 3290,3197 ; v1@3892.5,3073 v1@3898.15,3073 ; rx4.1 3905.12,3437.88 v1(3908,3435) ; rx4.1@3905.12,3500 3865.43,3539.69 ; v1(3936,3566) 3919,3549 3874.75,3549 3865.43,3539.69 ; irled5.1@3968.93,2753 irled5.1 ; v1(4283,3338) 4285.12,3338 4302.49,3320.63 reg3.5 4373.47,3315.28 4373.47,3283 ; c6.1 4373.47,3283 ; v1(4646,2995) 4659.85,3008.85 r43.2 r42.2 ; v1(4666,3158) 4666,3234.64 4630.64,3270 4489.38,3270 4476.38,3283 4373.47,3283 ; v1(4860,2905) 4897,2868 4897,2817 4899.1,2814.9 1.1 ; 3290,3197 3290,3302.41 3389.79,3402.2 3391.26,3402.2 3402.53,3413.47 3519.47,3413.47 3620.66,3514.66 3682.48,3514.66 3707.51,3539.69 3865.43,3539.69
  Bottom Layer w20: v1(3043.54,2850) 3044,2849.53 3044,2916.01 3148.11,3020.12 3203.12,3020.12 v1(3251,3068) ; v1(3889,3073) 3945,3129 3945,3337.15 3908,3374.15 v1(3908,3435) ; v1(3936,3566) 4005,3566 4126,3445 4159.15,3445 4199.15,3405 4216,3405 v1(4283,3338) ; v1@4651,2990 v1(4646,2995) 4646,3002 4664,3020 4774.15,3020 4809,3054.85 ; v1(4666,3158) 4714,3110 4786.15,3110 4809,3087.15 4809,3054.85 ; v1(4860,2905) 4860,2977.15 4809,3028.15 4809,3054.85
pads on no net: Designator9.0 Designator10.0 mcu.20 mcu.22 mcu.26 reg1.4 reg2.4 reg3.4 rgbdriver.5 rgbdriver.7 s1.2 s1.4

## Polygon pours and split planes (outlines as drawn)
GND on Bottom Layer "Bottom Layer-No Net" (solid, remove dead copper, pour order 2): 3174,1554 4889,1554 4889,1588 5144,1843 5281,1980 5281,2324 5281,2901 5285,2905 4989,3201 4989,3535 4570,3535 4350,3755 4347,3758 3407,3758 3005,3758 2483,3236 2118,2871 2118,2235 2118,1685 2235,1568

## Keep-outs
Keep-Out Layer:
  lines w1: 2711.46,2572.24 ccw(c4000,2400) 3077.19,1484.35 ; 2713.41,2571.98 cw(c2762.86,2569.84) 2812.11,2564.89 ; 2748.29,2753.47 ccw(c2793.65,2732.45) 2842.73,2722.91 ; 2748.93,2753.29 cw(c4000,2400) 4428.8,3627.25 ; 2811.4,2564.99 ccw(c4000,2400) 3120.68,1583.43 3121.31,1582.8 3318,1582.8 cw(c3318,1532.8) 3306.02,1484.25 ; 2844.15,2722.51 cw(c4000,2400) 4386.2,3536.16 ; 3077,1484.16 3306,1484.16 ; 3489.24,1582.76 ccw(c3483.49,1533.6) 3481,1484.16 3656.64,1484.16 3656.64,1129.2 4343.36,1129.2 4343.36,1483.53 4524.78,1483.53 ; 3489.24,1582.8 3685.04,1582.8 ; 4314.96,1582.8 4536.76,1582.8 ; 4386.21,3536.19 ccw(c4410.7,3579.2) 4428.19,3625.51 ; 4524.78,1484.28 ccw(c4536.76,1532.83) 4536.76,1582.83 ; 4543.82,3469.25 cw(c4563.36,3515.27) 4593.35,3555.28 ; 4544,3469.61 cw(c4000,2400) 5146.68,2753.72 ; 4593.92,3556.4 cw(c4000,2400) 5244.54,2775.67 ; 4699.76,1483.53 4922.5,1483.53 ; 4699.76,1484.19 cw(c4702.26,1533.63) 4708,1582.8 4878.69,1582.8 4879.32,1583.43 ccw(c4000,2400) 5182.52,2604.09 ; 4922.49,1484.02 ccw(c4000,2400) 5284.2,2602.09 ; 5146,2759 ccw(c5195.2,2764.46) 5243.47,2775.43 ; 5184.49,2592.14 cw(c5233.21,2603.39) 5283.2,2602.64

## Other copper
Bottom Layer:
  pour cut-out: 3626.08,2334.33 3627.74,2335.99 4418,2335.99 4418,2184.32 4417.68,2184 3626,2184
  text "Self-Organizing Systems" at 4404,2287 h35
  text "Research Group" at 4404,2242 h35
  text "Harvard" at 4404,2198 h35
  text "AERobot" at 4220,1298 h70

## Silkscreen, mask and mechanical layers (free items; w line width, h text height)
Top Overlay:
  text "C" at 3869,3433 h20
  text "C" at 3375,3122 h20 r180
  text "C" at 4622,3096 h20
  text "C" at 4042,2785 h20 r90

## Text inside footprints (layer, text, board x,y; h text height)
1: Top Overlay "C" at 4982.03,2805.09 h20 r200
ld: Top Overlay "C" at 4766.09,3169.17 h20 r200
led2: Top Overlay "C" at 3199.74,3022.71 h20 r334
led4: Top Overlay "C" at 4085,3369 h20 r270
rgbled: Top Overlay "A" at 3250,1682 h20
rx2: Top Overlay "C" at 3046.27,2892.84 h20 r334
rx4: Top Overlay "C" at 3901,3450 h20 r270